# Altium PCB Transistorverstaerker.PcbDoc
Units mil, origin at the board's own origin, x right, y up, seen from the top; angles counter-clockwise.
Board outline 2559.06 x 1673.23 mil, 2 copper layers (Top Layer, Bottom Layer); 18 components, 10 nets, 42 pads, 0 vias.
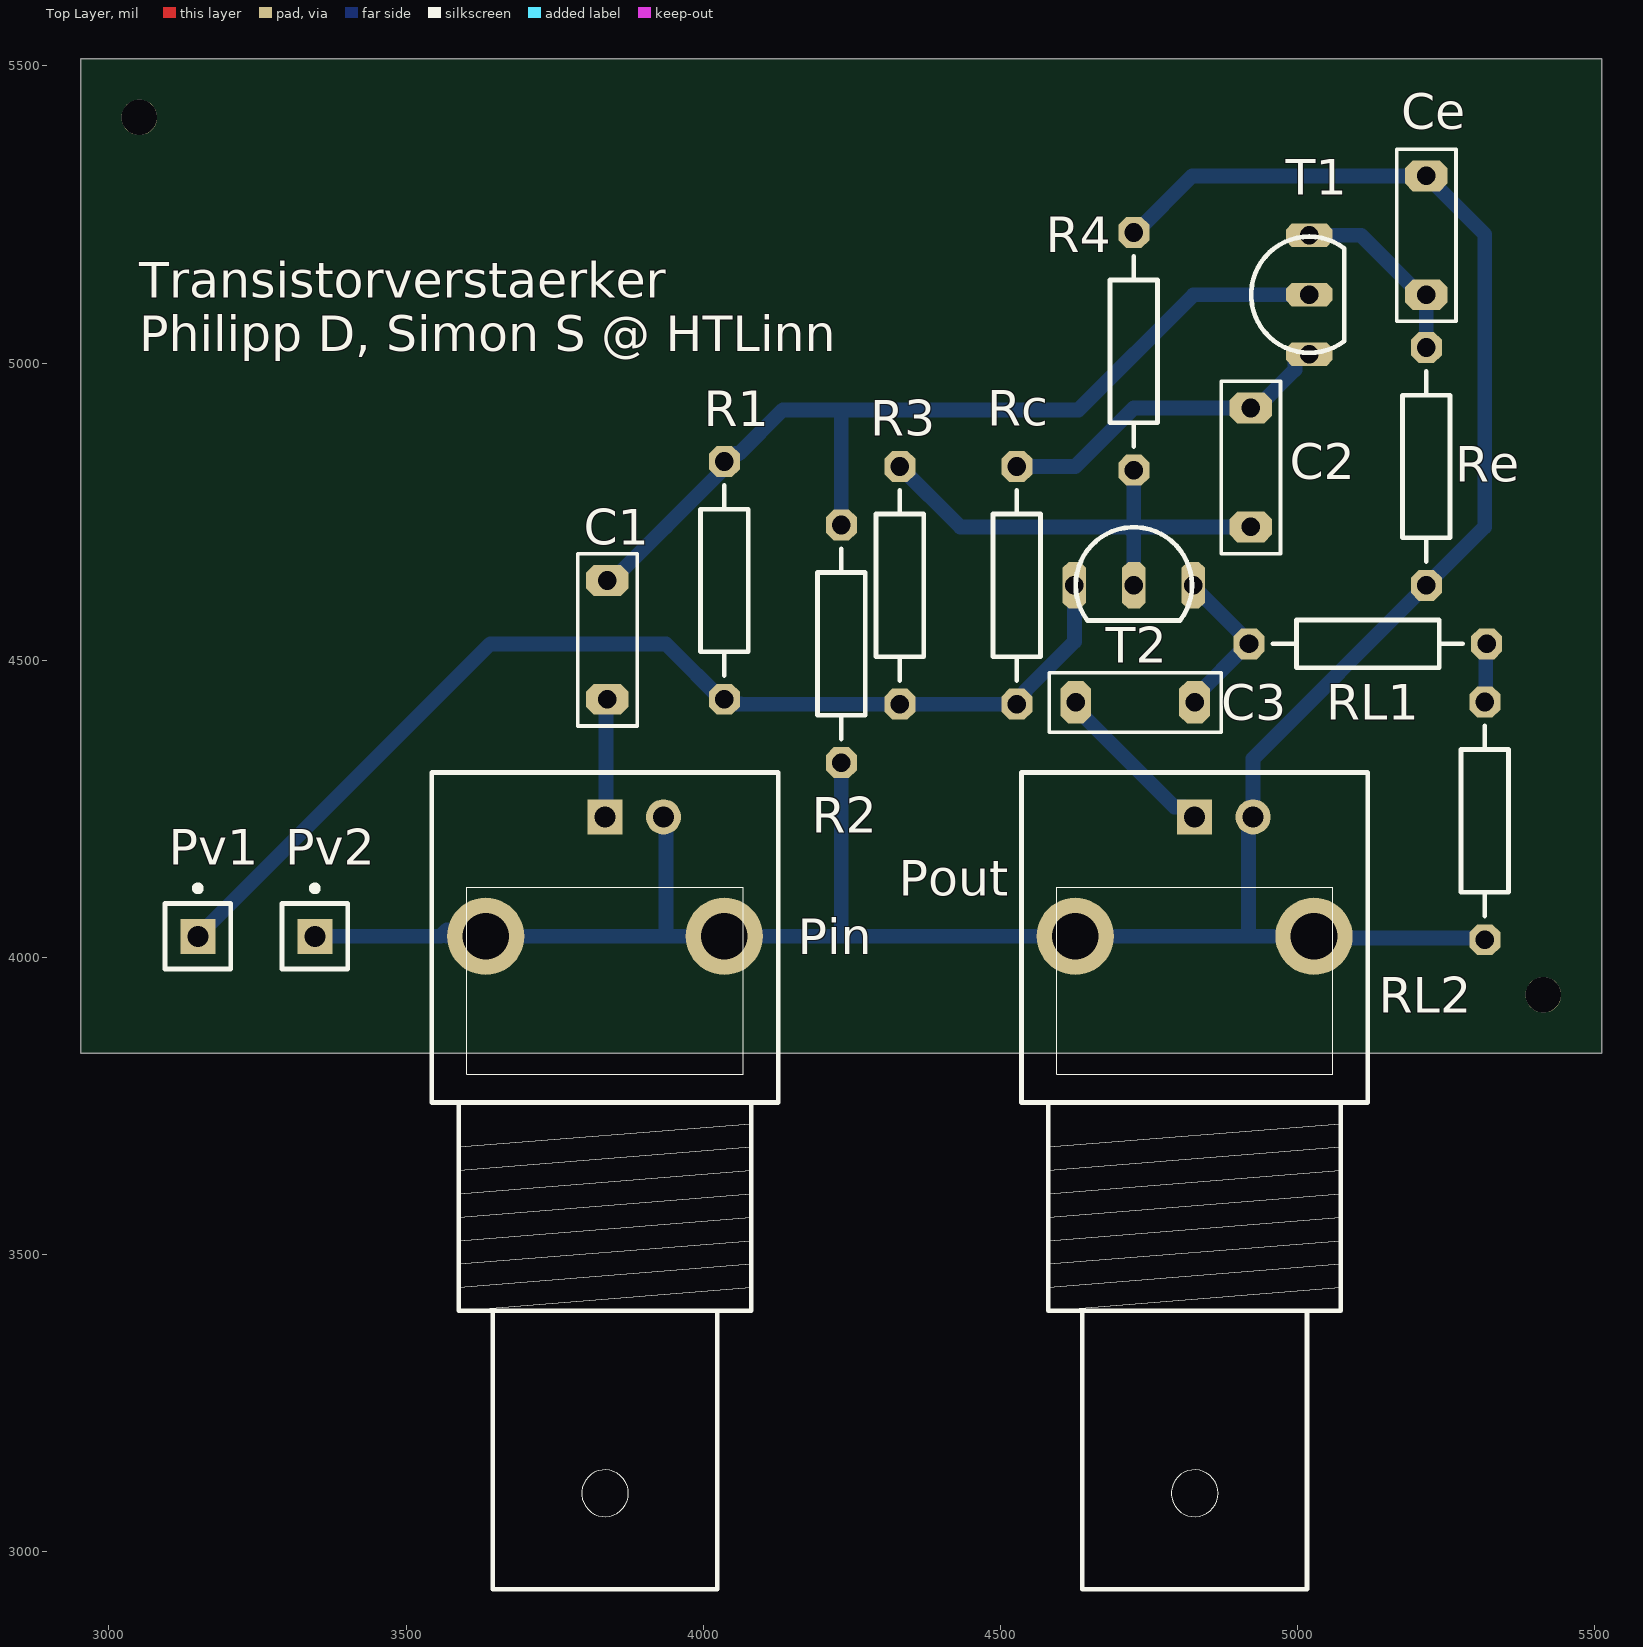
[diagram p0: Top Layer view]
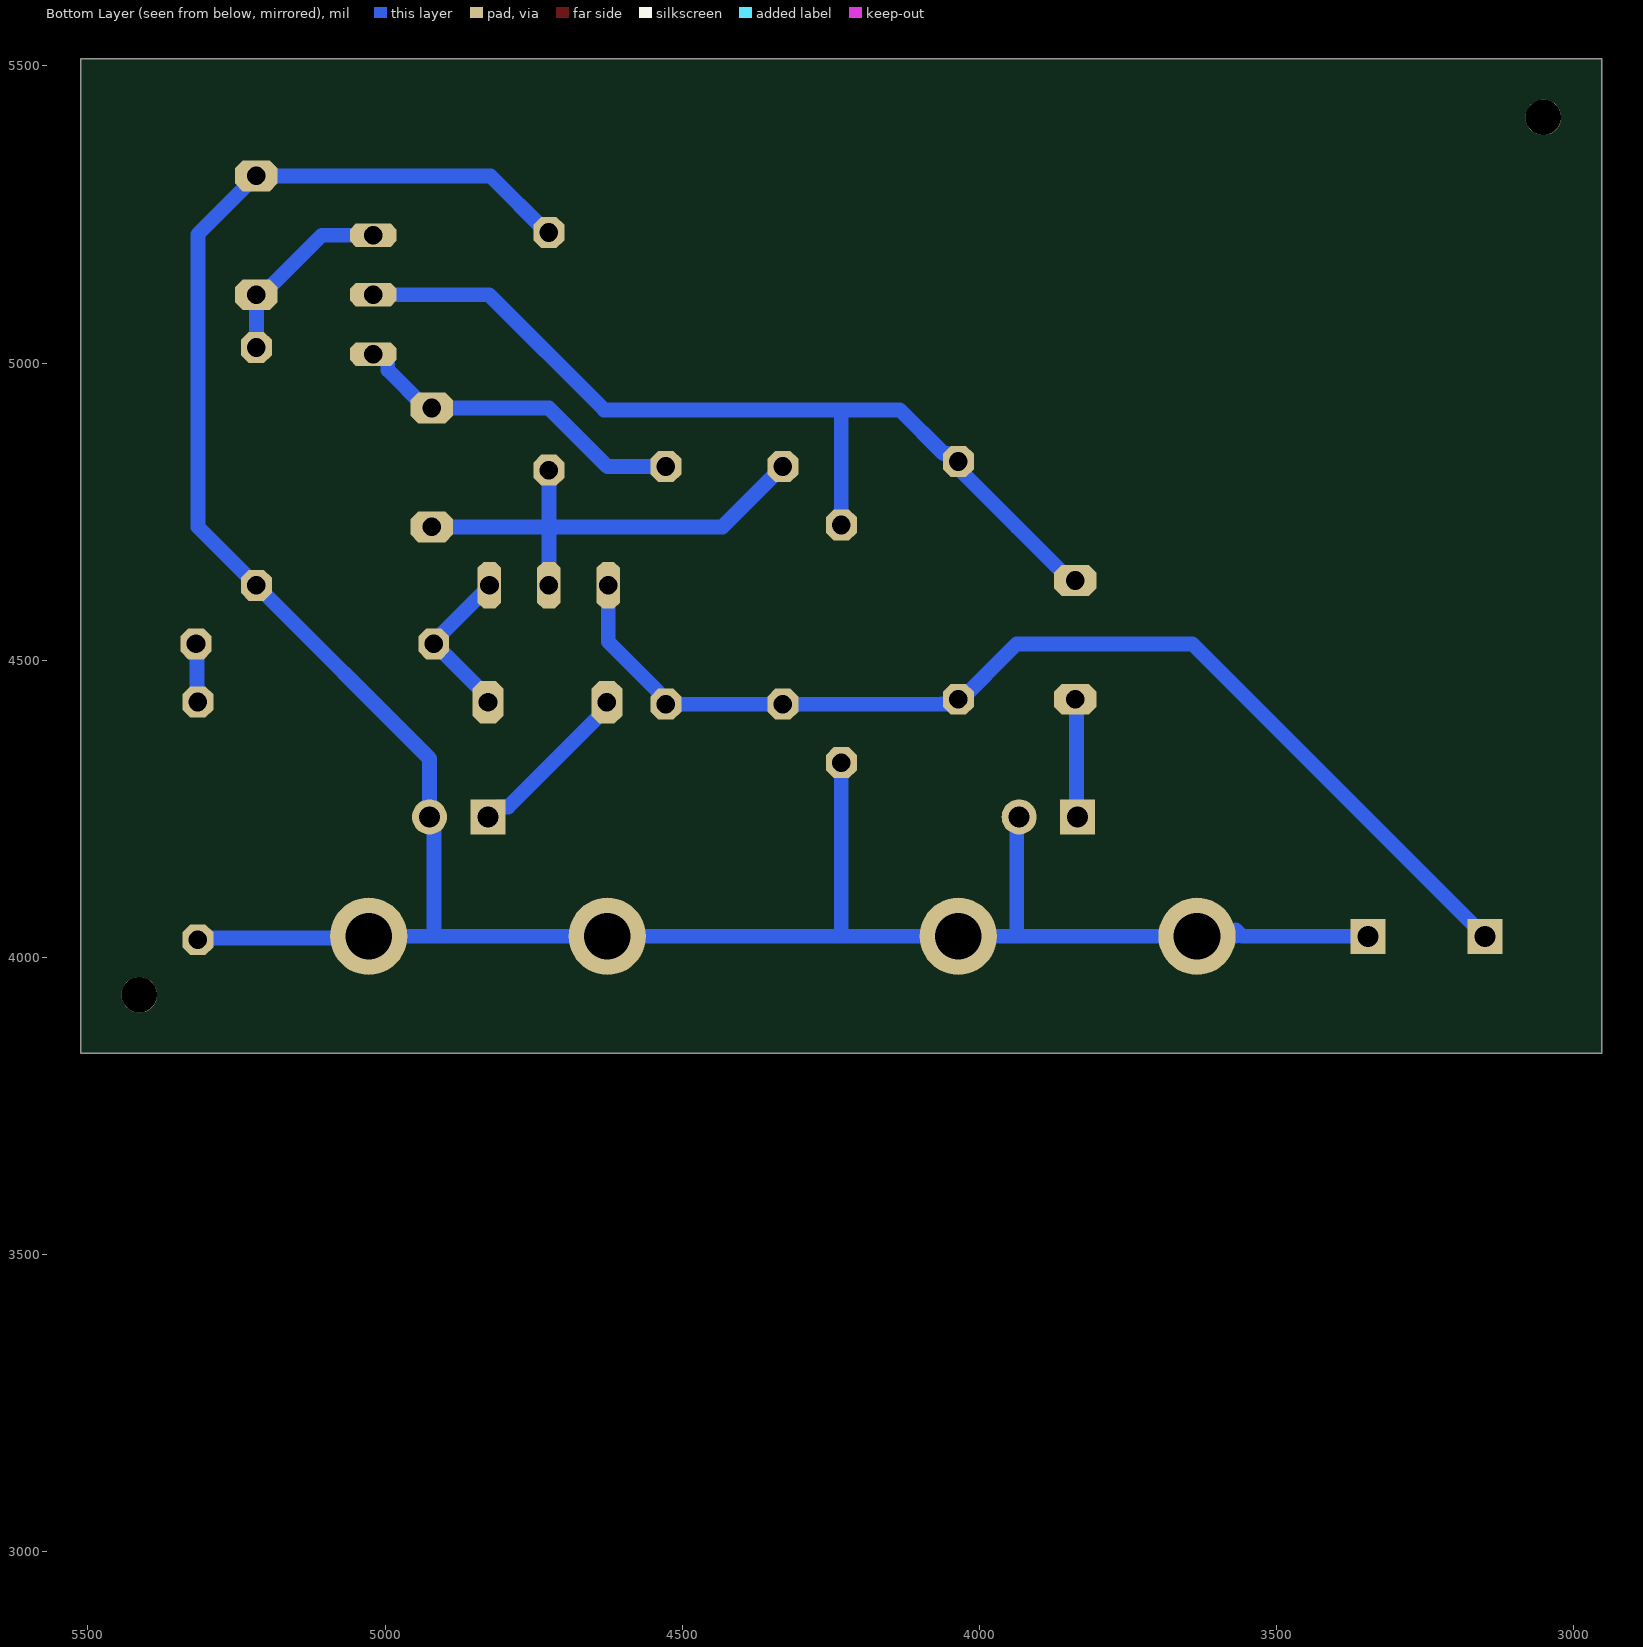
[diagram p1: Bottom Layer view, seen from below]
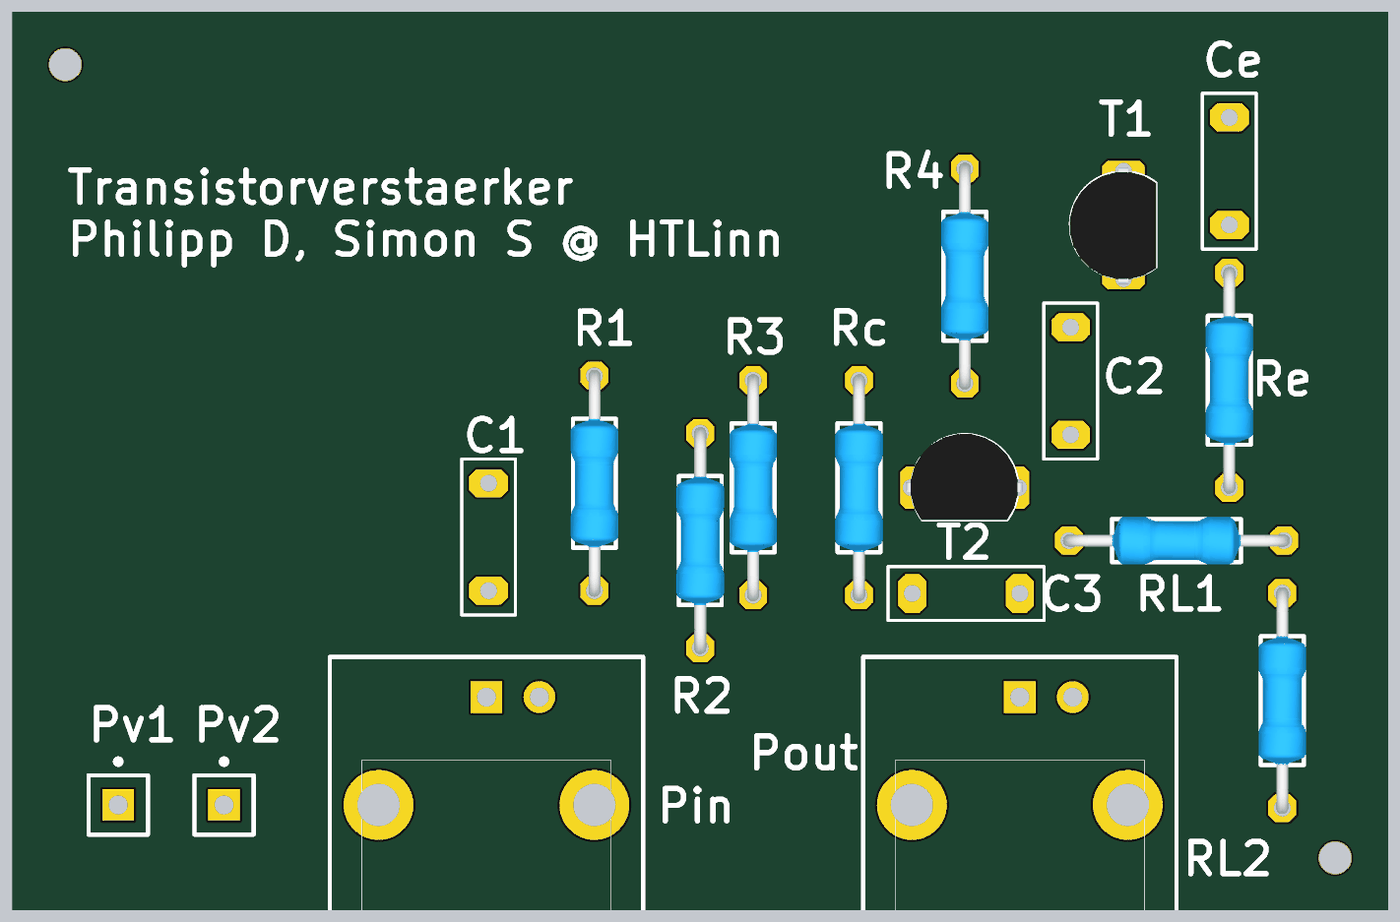
[diagram p2: 3D render of the assembled board from above, using the file's embedded part models]

## Layer stack, top to bottom
Top Solder: solder mask 0.4, Solder Resist, Dk 3.5
Top Layer: signal copper 1.4
Dielectric1: dielectric 12.6, FR-4, Dk 4.8
Bottom Layer: signal copper 1.4
Bottom Solder: solder mask 0.4, Solder Resist, Dk 3.5

## Board outline
2952.76,3838.58 2952.76,5511.81 5511.81,5511.81 5511.81,3838.58

## Design rules (kind name [scope] priority, off if disabled: settings)
Clearance "Text (Polygon)" [inPolygon vs isText] p1: gap=0 ignorepadtopadclearanceinfootprint=FALSE
Clearance "Masseflaeche (Polygon)" [All vs inPolygon] p2: gap=20 ignorepadtopadclearanceinfootprint=FALSE except(0: Arc-Hole Track-Hole SMDPad-Hole THPad-Hole Via-Hole Fill-Hole Poly-Hole Region-Hole Text-Hole)
Clearance "Abstand (Clearance)" [All] p3: gap=10 ignorepadtopadclearanceinfootprint=FALSE except(0: Arc-Hole Track-Hole SMDPad-Hole THPad-Hole Via-Hole Fill-Hole Poly-Hole Region-Hole Text-Hole)
DiffPairsRouting [All] p1: maxlimit=15 minlimit=12 mostfreqgap=12 toplayer_minwidth=15 toplayer_maxwidth=15 toplayer_prefwidth=15 bottomlayer_minwidth=15 bottomlayer_maxwidth=15 bottomlayer_prefwidth=15 maxuncoupledlength=500
FabricationTestPointUsage TestPointUsage [All] p1: valid=0 allowmultiple=FALSE
FabricationTestpoint Testpoint [All] p1: side=3 testpointundercomponent=TRUE minsize=40 maxsize=100 preferedsize=60 minholesize=0 maxholesize=40 preferedholesize=32 testpointgrid=1 allowsidetop=TRUE allowsidebottom=TRUE usegrid=TRUE gridtolerance=0.01
HoleSize [All] p1: absolutevalues=TRUE maxlimit=100 minlimit=28 maxpercent=80.000 minpercent=20.000
HoleToHoleClearance [All] p1: gap=10 allowstackedmicrovias=FALSE
PlaneConnect [All] p1: planeconnectstyle=Relief reliefexpansion=20 reliefentries=4 reliefconductorwidth=32 reliefairgap=10
PolygonConnect [All] p1: connectstyle=Relief reliefconductorwidth=32 reliefentries=4 polygonreliefangle="90 Angle" airgapwidth=10
RoomDefinition Transistorverstaerker [InComponentClass('Transistorverstaerker')] p1: confinementstyle=ConfineIn formatcopy=TRUE lockcomponents=FALSE outline 3051.18,2898.43 5413.39,2898.43 5413.39,5511.81 3051.18,5511.81
RoutingVias [All] p1: holewidth=28 width=50 viastyle="Through Hole" minholewidth=28 minwidth=50 maxholewidth=28 maxwidth=50
SMDEntry [All] p1: side=TRUE corner=TRUE anyangle=FALSE
SilkToSilkClearance [All] p1 off: silktosilkclearance=10
SilkToSolderMaskClearance SilkscreenOverComponentPads [IsPad] p1 off: minsilkscreentomaskgap=10 clearancetoexposedcopper=TRUE
SolderMaskExpansion [All] p1: expansion=4 istentingtop=FALSE
UnRoutedNet [All] p1: checkbadconnections=TRUE
Width [All] p1: maxlimit=200 minlimit=11 preferedwidth=25 minimp=50.000000 maximp=50.000000 favimp=50.000000
21 further rules are at their usual default settings.

## Components (designator, comment, footprint, x,y, rotation, side; value= is the part's Value field where it differs from the comment)
C1 "1uF" C_RM2-025X075 3838.58,4434.25 r90 top
C2 "790nF" C_RM2-025X075 4921.26,4924.41 r270 top
C3 "3uF" C_RM2-025X075 4826.77,4429.13 r180 top
Ce "39uF" C_RM2-025X075 5216.54,5314.96 r270 top
Pin "BNC" "BNC_RA CON" 3834.65,4236.22 r90 top
Pout "BNC" "BNC_RA CON" 4826.77,4236.22 r90 top
Pv1 "Plug" PIN1 3149.61,4035.43 r0 top
Pv2 "Plug" PIN1 3346.46,4035.43 r0 top
R1 "47K" R_0207/RM4 4035.43,4634.25 r270 top
R2 "8.2K" R_0207/RM4 4232.28,4527.56 r90 top
R3 "8.2K" R_0207/RM4 4330.71,4625.98 r270 top
R4 "27K" R_0207/RM4 4724.41,5019.69 r270 top
Rc "1.2K" R_0207/RM4 4527.56,4625.98 r270 top
Re "270" R_0207/RM4 5216.54,4825.98 r90 top
RL1 "180" R_0207/RM4 5118.11,4527.56 r180 top
RL2 "180" R_0207/RM4 5314.96,4229.7 r90 top
T1 "BC547A" TO-92A-2 5019.69,5014.96 r0 top
T2 "BC547A" TO-92A-2 4624.41,4625.98 r270 top

## Footprints (in the part's own frame and the unit in brackets; to place one, negate y for a bottom-side part, rotate by r counter-clockwise, add the part's x,y. Pads: shape width x height; smd on the part's side, far side on the other; paste and mask are expansions set on the pad)
"BNC_RA CON" [mm] "Connector; BNC Elbow"
  rect 1.5x1.5 hole 0.9: 1(0,0)
  round 3.3 hole 2: 2(-5.1,-5.1) 2(-5.1,5.1)
  round 1.5 hole 0.9: 2(0,-2.5)
  silkscreen extent -33,-7.4 1.9,7.4
C_RM2-025X075 [mil] "RM2, outline 2.5 x 7.5 mm"
  oct 52x72 hole 31.5: 1(0,0) 2(200,0)
  silkscreen extent -45,-50 245,50
PIN1 [mm] "Connector; Plug"
  rect 1.5x1.5 hole 0.9: 1(0,0)
  silkscreen extent -1.4,-1.4 1.4,2.17
R_0207/RM4 [mil] "type 0207, RM4"
  oct 52x52 hole 31.5: 1(-200,0) 2(200,0)
  silkscreen extent -160,-40 160,40, body extent -211,-44 211,44, height 94
TO-92A-2 [mm] "TO, Flat Index; 3 In-Line, Axial Leads; Body Dia. 4.5mm; Leads 0.51 x 0.48 mm (max)"
  oct 2x1 hole 0.8: 1(0,0) 2(0,2.54) 3(0,5.08)
  silkscreen extent -2.48,0.06 1.5,5.02, body extent -2.54,-0.25 1.54,5.28, height 7.24

## Part data
C1 C2 C3 Ce: library part C, "Capacitor", Rated Voltage=50V, LatestRevisionDate=07-Sep-2019, Published=21-Feb-2011, Usage="only permitted for non-commercial purposes at HTL I Innsbruck"
Pin Pout: "BNC Elbow Connector", LatestRevisionDate=17-Jul-2002, LatestRevisionNote="Re-released for DXP Platform.", Publisher="Altium Limited"
R1 R2 R3 R4 Rc Re RL1 RL2: library part R, "Resistor", LatestRevisionDate=07-Sep-2019, Published=21-Feb-2011, Usage="only permitted for non-commercial purposes at HTL I Innsbruck"
T1 T2: "NPN General-purpose Transistor", LatestRevisionDate=31-Oct-2012, Published=21-Feb-2011, SimulationModellSource="Philips Discrete BJT - Low Power", Usage="only permitted for non-commercial purposes at HTL I Innsbruck"
Pv1 Pv2: LatestRevisionDate=17-Jul-2002, LatestRevisionNote="Re-released for DXP Platform.", Publisher="Altium Limited"

## Free pads (board coordinates)
  round 60 hole 60: 2(3051.18,5413.39) 3(5413.39,3937.01)

## Nets (pads, with @x,y where several pads share a name; then routed paths per layer and width w, separated by ;. In a path a pad name is that pad's centre, name@x,y a point inside that pad or via, vN(x,y) a via of type N, cw(c..) or ccw(c..) an arc to the next point about the centre after c; other vN are vias at no path point)
GND: Ce.1 Pin.2 Pout.2 Pv2.1 R2.1 R4.1 Re.1 RL2.1 | length 4495.3
  Bottom Layer w25: Pv2.1 3557.81,4035.43 3568.57,4046.19 ; 3568.57,4035.43 Pin.2@3633.86,4035.43 ; Pin.2@3641.73,4043.31 Pin.2@3633.86,4035.43 ; Pin.2@3933.07,4236.22 3937.01,4232.28 3937.01,4035.43 ; R2.1 4232.28,4035.43 ; R4.1 4727.56,5219.69 4822.83,5314.96 Ce.1 5314.96,5216.54 5314.96,4724.41 Re.1 4925.2,4334.65 4925.2,4236.22 4917.32,4236.22 4917.32,4037.63 4919.52,4035.43 ; Pout.2@5019.68,4035.43 4919.52,4035.43 ; Pout.2@5027.56,4035.43 5030.42,4032.57 5312.1,4032.57 RL2.1 ; Pin.2@3633.86,4035.43 3894.49,4035.43 3937.01,4035.43 ; 3937.01,4035.43 4035.43,4035.43 4232.28,4035.43 ; 4232.28,4035.43 4625.98,4035.43 4919.52,4035.43
IN: C1.1 Pin.1 | length 199.7
  Bottom Layer w25: Pin.1 3836.61,4238.19 3836.61,4432.28 C1.1
NetC1_2: C1.2 R1.1 R2.2 T1.2 | length 1569.2
  Bottom Layer w25: C1.2 3846.85,4634.25 3937.01,4724.41 R1.1@4035.43,4822.83 ; R1.1 4041.11,4834.25 4054.61,4847.75 4060.35,4847.75 4133.86,4921.26 4232.28,4921.26 ; R2.2 4232.28,4921.26 ; T1.2 4825.03,5114.96 4631.33,4921.26 4232.28,4921.26
NetC2_1: C2.1 Rc.1 T1.1 | length 581.7
  Bottom Layer w25: Rc.1 4625.98,4825.98 4724.41,4924.41 C2.1 4931.26,4924.41 4995.34,4988.48 4995.34,5007.78 5002.52,5014.96 T1.1
NetC2_2: C2.2 R3.1 R4.2 T2.2 | length 822.8
  Bottom Layer w25: R3.1 4432.28,4724.41 4714.57,4724.41 4724.41,4714.57 T2.2 ; R4.2 4724.41,4724.41 C2.2 C2.2@4919.69,4722.83
NetC3_1: C3.1 RL1.2 T2.3 | length 279.5
  Bottom Layer w25: T2.3@4822.83,4625.98 4921.26,4527.56 RL1.2 4916.65,4527.56 4826.77,4437.68 C3.1
NetCe_2: Ce.2 Re.2 T1.3 | length 327.2
  Bottom Layer w25: T1.3 5106.54,5214.96 5206.54,5114.96 Ce.2 Re.2
NetRL1_1: RL1.1 RL2.2 | length 99.2
  Bottom Layer w25: RL2.2 5316.54,4431.28 5316.54,4525.98 RL1.1
OUT: C3.2 Pout.1 | length 285.8
  Bottom Layer w25: C3.2 4626.77,4419.13 4792.66,4253.25 4809.74,4253.25 Pout.1
VCC: Pv1.1 R1.2 R3.2 Rc.2 T2.1 | length 1864
  Bottom Layer w25: Pv1.1 3641.73,4527.56 3937.01,4527.56 4038.14,4426.43 4063.14,4426.43 4063.58,4425.98 R3.2 Rc.2 4527.56,4431.66 4541.06,4445.16 4541.06,4447.75 4624.41,4531.1 T2.1

## Other copper
Top Layer:
  text "LAYOUT TOP" at 10300,880 h70
  text "2" at 10300,280 h70
Bottom Layer:
  text "LAYOUT BOTTOM" at 11200,900 h70
  text "3" at 10433.07,295.28 h70

## Silkscreen, mask and mechanical layers (free items; w line width, h text height)
Top Overlay:
  text "Transistorverstaerker / Philipp D, Simon S @ HTLinn" at 3051.18,5019.69 h60
  text "BESTUECK. TOP" at 10300,880 h70
  text "4" at 10300,280 h70
Bottom Overlay:
  text "BESTUECK. BOTTOM" at 10300,880 h70
  text "5" at 10300,280 h70
Mechanical 4 (Printumriss):
  the board outline again, w10
Mechanical 16 (Blatt-Beschriftung):
  drawing of 350 lines, arcs and shapes, not listed
  text "1" at 1427,7465 h70
  text "2" at 4287,7465 h70
  text "3" at 7167,7465 h70
  text "4" at 10037,7465 h70
  text "A" at 75,6559 h70
  text "A" at 11375,6559 h70
  text "B" at 75,4667 h70
  text "B" at 11375,4667 h70
  text "C" at 75,2757 h70
  text "C" at 11375,2757 h70
  text "TITEL:" at 6850,1300 h45
  text "Transistorverstaerker" at 6900,1180 h70
  text "NAME:" at 6850,1000 h45
  text "GRUPPE:" at 8350,1000 h45
  text "KLASSE:" at 9180,1000 h45
  text "DOKUMENTENART:" at 10250,1000 h45
  text "PHILIPP D, SIMON S" at 6900,880 h70
  text "4" at 8400,880 h70
  text "3AHEL" at 9230,880 h70
  text "D" at 75,867 h70
  text "D" at 11375,867 h70
  text "DATUM:" at 6850,700 h45
  text "REVISION:" at 8350,700 h45
  text "MASZSTAB:" at 9180,700 h45
  text "DOKUMENTENSTATUS:" at 10250,700 h45
  text "HTBLVA" at 5550,600 h70
  text ".PRINT_DATE" at 6900,580 h70
  text "0.1" at 8400,580 h70
  text ".Print_Scale" at 9230,580 h70
  text "ENTWURF" at 10300,580 h70
  text "Abt. Elektronik" at 5550,500 h70
  text "Anichstrasse 26-28" at 5550,400 h70
  text "SACHNUMMER/DATEINAME:" at 6850,400 h45
  text "BLATT:" at 10250,400 h45
  text "BLAETTER:" at 10800,400 h45
  text "A-6020 Innsbruck" at 5550,300 h70
  text ".PCB_FILE_NAME_NO_PATH" at 6900,280 h70
  text "6" at 10850,280 h70
  text "1" at 1427,65 h70
  text "2" at 4287,65 h70
  text "3" at 7167,65 h70
  text "4" at 10037,65 h70
Drill Drawing:
  text ".LEGEND" at 4700,1800 h60
  text "BOHRPLAN" at 10826.77,885.83 h70
  text "6" at 10433.07,295.28 h70

## Dimensions
2952.76,5511.81 to 5511.81,5511.81 on Mechanical 3 (Bemassungen)
2952.76,3838.58 to 2952.76,5511.81 on Mechanical 3 (Bemassungen)